# Altium PCB PCB_wordclocksmall_2022-11-27.pcbdoc (part 1 of 4)
Units mm, origin at the board's own origin, x right, y up, seen from the top; angles counter-clockwise.
Board outline 250.51 x 237.35 mm, 2 copper layers (Top Layer, Bottom Layer); 318 components, 218 nets, 1024 pads, 203 vias.
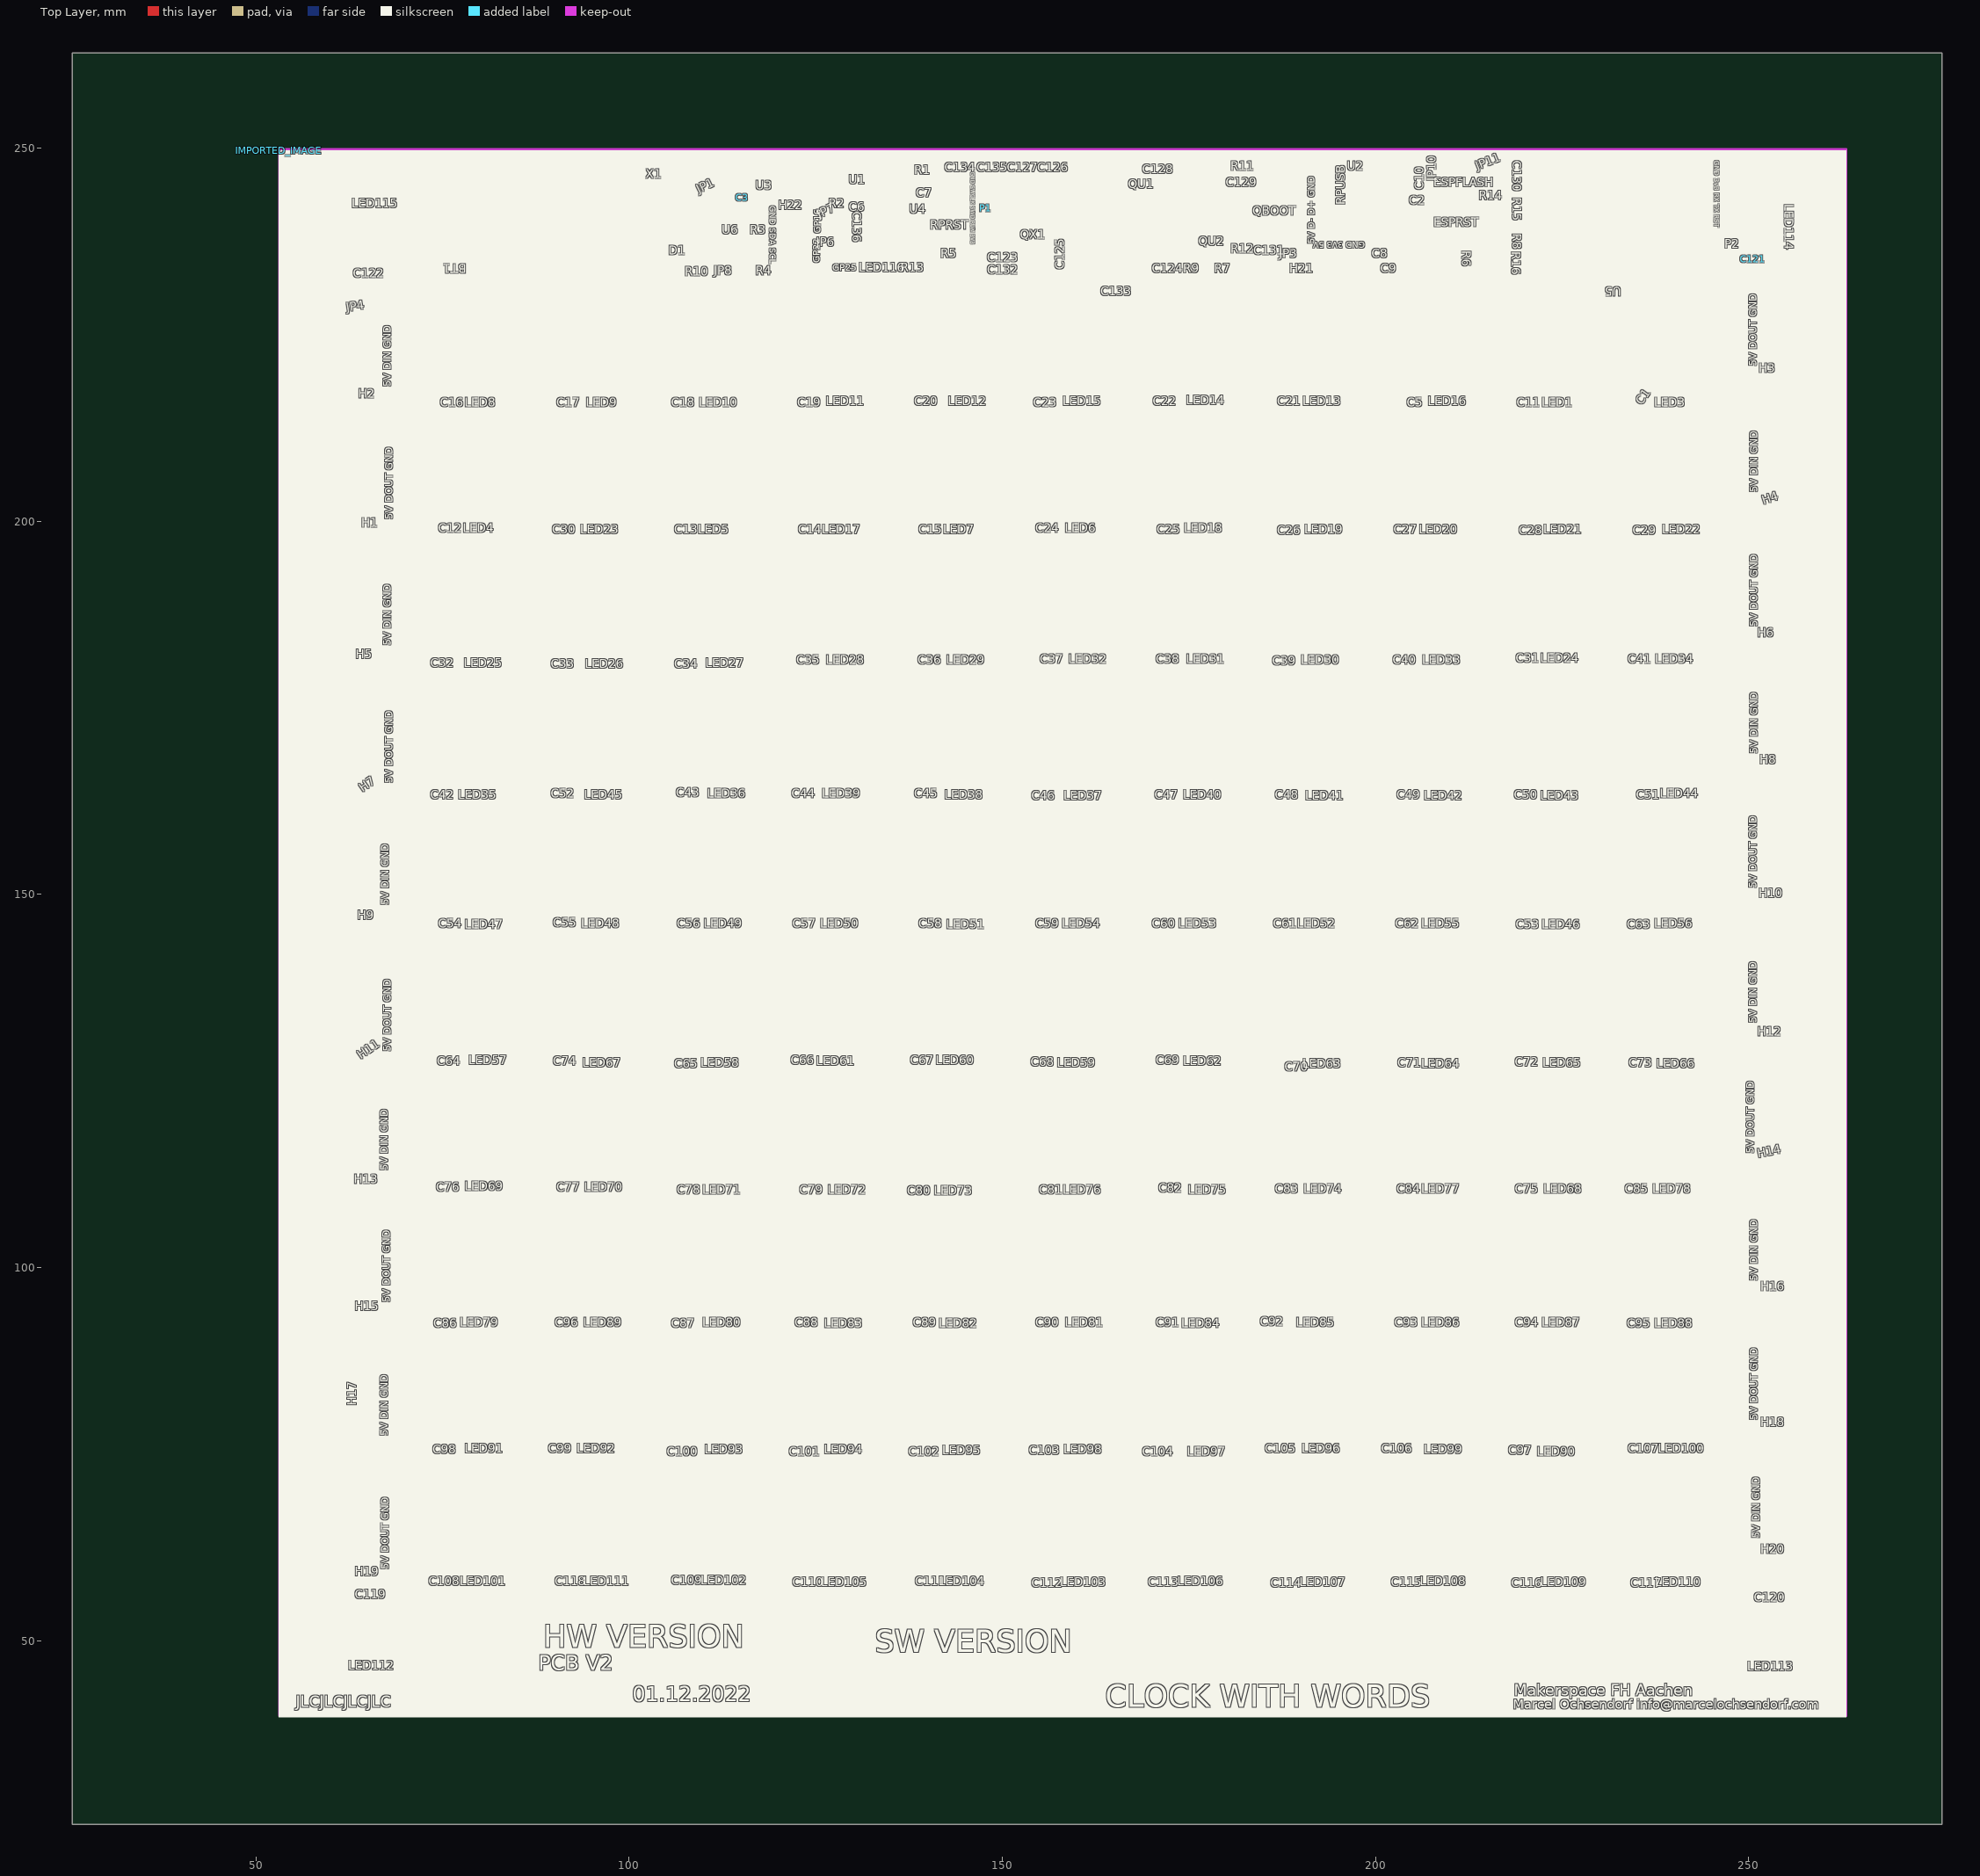
[diagram p0: Top Layer view]
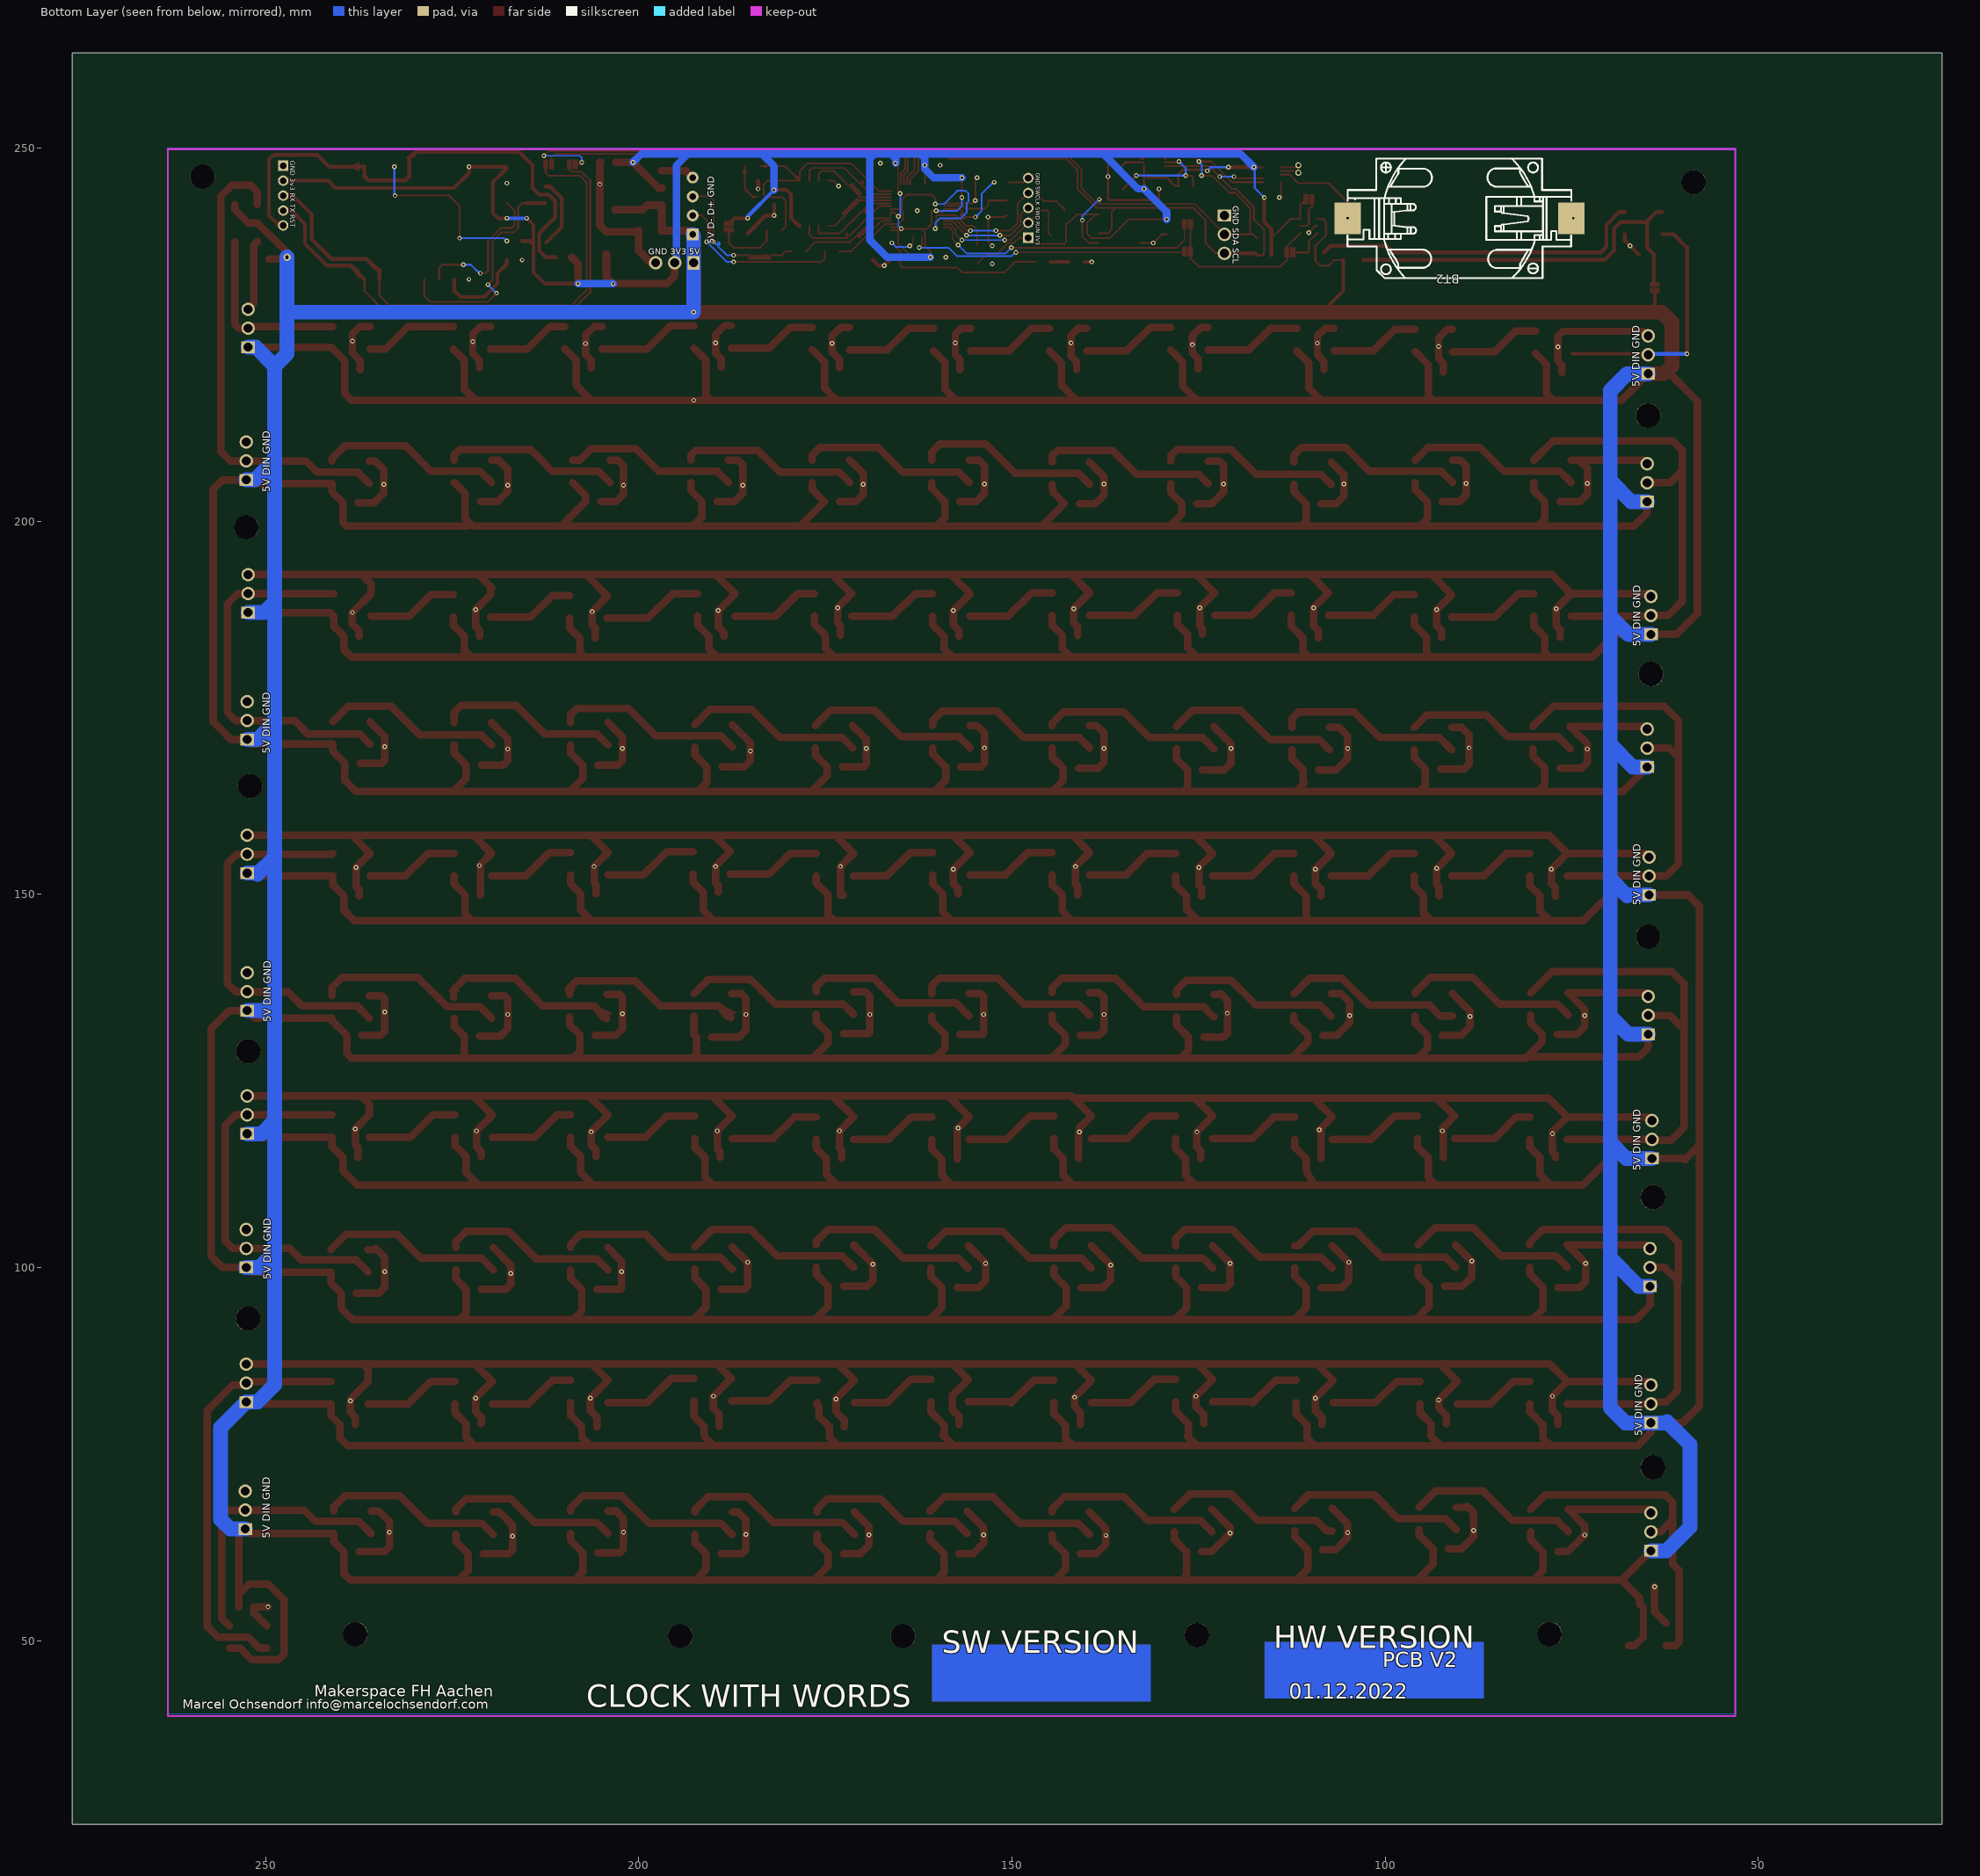
[diagram p1: Bottom Layer view, seen from below]

## Layer stack, top to bottom
Top Layer: signal copper (thickness not stored)
Dielectric: dielectric 0.32, FR-4, Dk 4.8
Bottom Layer: signal copper (thickness not stored)

## Board outline
275.915,25.4 25.4,25.4 25.4,262.754 275.915,262.754

## Components (designator, comment, footprint, x,y, rotation, side; value= is the part's Value field where it differs from the comment)
BT1 "BS-6-1" BAT-SMD_BS-6-1#1 90.045,240.593 r0 top
BT2 "BS-6-1" BAT-SMD_BS-6-1#2 90.045,240.593 r180 bottom
C1 "100nF" 0805 238.381,220.273 r180 top
C2 "100nF" 0805 204.218,241.736 r180 top
C3 "100nF" 0805 115.191,243.387 r180 top
C5 "100nF" 0805 207.393,220.527 r180 top
C6 "100nF" 0805 131.32,244.53 r0 top
C7 "100nF" 0805 136.146,244.53 r0 top
C8 "100uF" CAP-SMD_L3.5-W2.8 198.503,238.942 r0 top
C9 "100uF" CAP-SMD_L3.5-W2.8 204.345,237.291 r90 top
C10 "100nF" 0805 204.091,248.086 r180 top
C11 "100nF" 0805 222.379,220.527 r180 top
C12 "100nF" 0805 77.599,202.62 r180 top
C13 "100nF" 0805 109.603,202.366 r180 top
C14 "100nF" 0805 126.24,202.366 r180 top
C15 "100nF" 0805 141.988,202.366 r180 top
C16 "100nF" 0805 77.345,219.892 r180 top
C17 "100nF" 0805 93.22,220.019 r180 top
C18 "100nF" 0805 109.222,220.273 r180 top
C19 "100nF" 0805 126.113,220.4 r180 top
C20 "100nF" 0805 142.369,220.273 r180 top
C21 "100nF" 0805 189.994,220.654 r180 top
C22 "100nF" 0805 174.119,220.527 r180 top
C23 "100nF" 0805 157.99,220.273 r180 top
C24 "100nF" 0805 157.99,202.62 r180 top
C25 "100nF" 0805 174.119,202.62 r180 top
C26 "100nF" 0805 190.502,202.62 r180 top
C27 "100nF" 0805 206.123,202.62 r180 top
C28 "100nF" 0805 222.252,202.62 r180 top
C29 "100nF" 0805 238.635,202.493 r180 top
C30 "100nF" 0805 93.347,202.62 r180 top
C31 "100nF" 0805 222.379,184.586 r180 top
C32 "100nF" 0805 77.599,184.459 r180 top
C33 "100nF" 0805 93.474,184.459 r180 top
C34 "100nF" 0805 109.984,184.332 r180 top
C35 "100nF" 0805 125.478,184.84 r180 top
C36 "100nF" 0805 142.242,184.713 r180 top
C37 "100nF" 0805 158.117,184.586 r180 top
C38 "100nF" 0805 173.992,184.713 r180 top
C39 "100nF" 0805 189.613,184.586 r180 top
C40 "100nF" 0805 206.885,184.332 r180 top
C41 "100nF" 0805 238.508,184.586 r180 top
C42 "100nF" 0805 77.599,166.933 r180 top
C43 "100nF" 0805 109.984,166.679 r180 top
C44 "100nF" 0805 125.478,166.679 r180 top
C45 "100nF" 0805 142.115,166.933 r180 top
C46 "100nF" 0805 157.863,167.06 r180 top
C47 "100nF" 0805 173.738,167.06 r180 top
C48 "100nF" 0805 189.867,167.06 r180 top
C49 "100nF" 0805 206.504,167.314 r180 top
C50 "100nF" 0805 222.125,167.314 r180 top
C51 "100nF" 0805 238.381,167.568 r180 top
C52 "100nF" 0805 93.601,166.806 r180 top
C53 "100nF" 0805 222.252,149.915 r180 top
C54 "100nF" 0805 78.234,149.788 r180 top
C55 "100nF" 0805 93.855,149.788 r180 top
C56 "100nF" 0805 109.603,149.788 r180 top
C57 "100nF" 0805 125.605,149.788 r180 top
C58 "100nF" 0805 142.242,149.915 r180 top
C59 "100nF" 0805 158.244,150.042 r180 top
C60 "100nF" 0805 173.611,149.915 r180 top
C61 "100nF" 0805 190.375,150.296 r180 top
C62 "100nF" 0805 206.758,150.042 r180 top
C63 "100nF" 0805 238.508,149.788 r180 top
C64 "100nF" 0805 77.98,131.246 r180 top
C65 "100nF" 0805 109.349,131.119 r180 top
C66 "100nF" 0805 125.351,130.865 r180 top
C67 "100nF" 0805 141.861,131.119 r180 top
C68 "100nF" 0805 157.99,131.246 r180 top
C69 "100nF" 0805 173.611,131.373 r180 top
C70 "100nF" 0805 191.264,130.865 r180 top
C71 "100nF" 0805 206.885,131.119 r180 top
C72 "100nF" 0805 222.379,130.992 r180 top
C73 "100nF" 0805 238.127,131.119 r180 top
C74 "100nF" 0805 93.347,131.119 r180 top
C75 "100nF" 0805 222.125,114.863 r180 top
C76 "100nF" 0805 78.234,114.736 r180 top
C77 "100nF" 0805 93.22,114.736 r180 top
C78 "100nF" 0805 109.603,114.609 r180 top
C79 "100nF" 0805 125.732,114.609 r180 top
C80 "100nF" 0805 142.115,114.609 r180 top
C81 "100nF" 0805 158.371,114.482 r180 top
C82 "100nF" 0805 173.865,114.609 r180 top
C83 "100nF" 0805 190.121,114.736 r180 top
C84 "100nF" 0805 206.758,114.863 r180 top
C85 "100nF" 0805 238.635,114.736 r180 top
C86 "100nF" 0805 77.853,97.337 r180 top
C87 "100nF" 0805 109.603,97.337 r180 top
C88 "100nF" 0805 125.605,97.337 r180 top
C89 "100nF" 0805 141.734,97.337 r180 top
C90 "100nF" 0805 158.371,97.337 r180 top
C91 "100nF" 0805 173.611,97.464 r180 top
C92 "100nF" 0805 189.994,97.083 r180 top
C93 "100nF" 0805 206.631,97.083 r180 top
C94 "100nF" 0805 222.125,97.083 r180 top
C95 "100nF" 0805 238.889,96.575 r180 top
C96 "100nF" 0805 93.093,97.464 r180 top
C97 "100nF" 0805 222.125,79.049 r180 top
C98 "100nF" 0805 77.853,78.922 r180 top
C99 "100nF" 0805 92.839,79.049 r180 top
C100 "100nF" 0805 109.476,78.922 r180 top
C101 "100nF" 0805 125.351,79.049 r180 top
C102 "100nF" 0805 141.861,78.922 r180 top
C103 "100nF" 0805 158.117,78.922 r180 top
C104 "100nF" 0805 173.484,78.668 r180 top
C105 "100nF" 0805 190.248,78.668 r180 top
C106 "100nF" 0805 206.631,78.668 r180 top
C107 "100nF" 0805 239.016,78.922 r180 top
C108 "100nF" 0805 77.853,61.904 r180 top
C109 "100nF" 0805 109.349,62.158 r180 top
C110 "100nF" 0805 125.605,61.904 r180 top
C111 "100nF" 0805 141.861,61.65 r180 top
C112 "100nF" 0805 158.117,61.65 r180 top
C113 "100nF" 0805 173.611,61.65 r180 top
C114 "100nF" 0805 189.994,61.65 r180 top
C115 "100nF" 0805 206.504,61.777 r180 top
C116 "100nF" 0805 221.871,61.65 r180 top
C117 "100nF" 0805 238.508,61.904 r180 top
C118 "100nF" 0805 92.585,62.285 r180 top
C119 "100nF" 0805 64.899,54.919 r180 top
C120 "100nF" 0805 252.605,54.538 r180 top
C121 "100nF" 0805 250.573,235.132 r0 top
C122 "100nF" 0805 65.026,235.767 r0 top
C123 "100nF" 0805 153.672,236.91 r180 top
C124 "100nF" 0805 168.658,236.021 r270 top
C125 "100nF" 0805 159.895,235.386 r0 top
C126 "100nF" 0805 160.657,247.705 r0 top
C127 "100nF" 0805 155.704,246.054 r0 top
C128 "100nF" 0805 166.626,247.959 r180 top
C129 "100nF" 0805 181.866,243.387 r270 top
C130 "100nF" 0805 217.68,246.308 r270 top
C131 "100nF" 0805 185.422,239.577 r90 top
C132 "100nF" 0805 153.672,234.497 r0 top
C133 "100nF" 0805 164.975,235.386 r180 top
C134 "10pF" C0805 150.751,241.99 r270 top
C135 "10pF" C0805 151.386,245.419 r0 top
C136 "100nF" 0805 129.288,239.45 r270 top
D1 "CD4148WP" D1206-RD 104.269,235.005 r0 top
ESPFLASH "PTS810SJM250SMTRLFS" KEY-SMD_4P-L4.2-W3.2-P2.20-LS4.6 210.441,243.768 r0 top
ESPRST "PTS810SJM250SMTRLFS" KEY-SMD_4P-L4.2-W3.2-P2.20-LS4.6 210.314,238.434 r180 top
H1 "Header-Male-2.54_1x3" HDR-TH_3P-P2.54-V-M-1 64.899,205.16 r90 top
H2 "Header-Male-2.54_1x3" HDR-TH_3P-P2.54-V-M-1 64.772,222.305 r90 top
H3 "Header-Male-2.54_1x3" HDR-TH_3P-P2.54-V-M-1 252.351,225.861 r90 top
H4 "Header-Male-2.54_1x3" HDR-TH_3P-P2.54-V-M-1 252.605,208.081 r90 top
H5 "Header-Male-2.54_1x3" HDR-TH_3P-P2.54-V-M-1 64.391,187.38 r90 top
H6 "Header-Male-2.54_1x3" HDR-TH_3P-P2.54-V-M-1 252.351,190.301 r90 top
H7 "Header-Male-2.54_1x3" HDR-TH_3P-P2.54-V-M-1 64.899,169.6 r90 top
H8 "Header-Male-2.54_1x3" HDR-TH_3P-P2.54-V-M-1 252.478,173.283 r90 top
H9 "Header-Male-2.54_1x3" HDR-TH_3P-P2.54-V-M-1 64.645,152.455 r90 top
H10 "Header-Male-2.54_1x3" HDR-TH_3P-P2.54-V-M-1 252.478,155.376 r90 top
H11 "Header-Male-2.54_1x3" HDR-TH_3P-P2.54-V-M-1 64.772,133.786 r90 top
H12 "Header-Male-2.54_1x3" HDR-TH_3P-P2.54-V-M-1 252.478,136.961 r90 top
H13 "Header-Male-2.54_1x3" HDR-TH_3P-P2.54-V-M-1 64.264,117.149 r90 top
H14 "Header-Male-2.54_1x3" HDR-TH_3P-P2.54-V-M-1 252.478,120.451 r90 top
H15 "Header-Male-2.54_1x3" HDR-TH_3P-P2.54-V-M-1 64.518,100.004 r90 top
H16 "Header-Male-2.54_1x3" HDR-TH_3P-P2.54-V-M-1 252.605,102.544 r90 top
H17 "Header-Male-2.54_1x3" HDR-TH_3P-P2.54-V-M-1 64.391,81.716 r90 top
H18 "Header-Male-2.54_1x3" HDR-TH_3P-P2.54-V-M-1 252.605,84.51 r90 top
H19 "Header-Male-2.54_1x3" HDR-TH_3P-P2.54-V-M-1 64.391,64.571 r90 top
H20 "Header-Male-2.54_1x3" HDR-TH_3P-P2.54-V-M-1 252.732,67.492 r90 top
H21 "PWR" HDR-TH_3P-P2.54-V-M-1 195.201,234.624 r0 top
H22 "RPI2C" HDR-TH_3P-P2.54-V-M-1 121.541,238.434 r270 top
IMPORTED_IMAGE "IMPORTED_IMAGE" IMPORTED_IMAGE 53.088,249.708 r0 top
JP1 "OEE" JUMPERS_SMT-JUMPER_2_NC_PASTE_NO-SILK 110.238,243.133 r180 top
JP3 "JUMPER-SMT_2" JUMPERS_SMT-JUMPER_2_NC_PASTE_NO-SILK 187.962,239.45 r90 top
JP4 "5VLSL" JUMPERS_SMT-JUMPER_2_NC_PASTE_NO-SILK 63.883,231.322 r90 top
JP6 "GP22WS" JUMPERS_SMT-JUMPER_2_NC_PASTE_NO-SILK 126.494,236.148 r180 top
JP7 "GP16WS" JUMPERS_SMT-JUMPER_2_NC_PASTE_NO-SILK 126.494,239.831 r180 top
JP8 "JUMPER-SMT_2" JUMPERS_SMT-JUMPER_2_NC_PASTE_NO-SILK 112.778,236.021 r0 top
JP10 "ESPTX" JUMPERS_SMT-JUMPER_2_NC_PASTE_NO-SILK 208.917,247.832 r180 top
JP11 "ESPRX" JUMPERS_SMT-JUMPER_2_NC_PASTE_NO-SILK 212.092,247.832 r180 top
LED1 "WS2812B-B" LED-5050_4P 222.379,224.591 r0 top
LED3 "WS2812B-B" LED-5050_4P 238.508,224.591 r0 top
LED4 "WS2812B-B" LED-5050_4P 77.599,206.684 r0 top
LED5 "WS2812B-B" LED-5050_4P 109.73,206.43 r0 top
LED6 "WS2812B-B" LED-5050_4P 158.244,206.684 r0 top
LED7 "WS2812B-B" LED-5050_4P 142.115,206.43 r0 top
LED8 "WS2812B-B" LED-5050_4P 77.345,223.956 r0 top
LED9 "WS2812B-B" LED-5050_4P 93.474,224.21 r0 top
LED10 "WS2812B-B" LED-5050_4P 109.349,224.337 r0 top
LED11 "WS2812B-B" LED-5050_4P 126.24,224.464 r0 top
LED12 "WS2812B-B" LED-5050_4P 142.496,224.337 r0 top
LED13 "WS2812B-B" LED-5050_4P 190.121,224.718 r0 top
LED14 "WS2812B-B" LED-5050_4P 174.246,224.464 r0 top
LED15 "WS2812B-B" LED-5050_4P 157.99,224.337 r0 top
LED16 "WS2812B-B" LED-5050_4P 207.393,224.591 r0 top
LED17 "WS2812B-B" LED-5050_4P 126.24,206.557 r0 top
LED18 "WS2812B-B" LED-5050_4P 174.246,206.684 r0 top
LED19 "WS2812B-B" LED-5050_4P 190.502,206.684 r0 top
LED20 "WS2812B-B" LED-5050_4P 206.377,206.684 r0 top
LED21 "WS2812B-B" LED-5050_4P 222.252,206.684 r0 top
LED22 "WS2812B-B" LED-5050_4P 238.635,206.557 r0 top
LED23 "WS2812B-B" LED-5050_4P 93.474,206.684 r0 top
LED24 "WS2812B-B" LED-5050_4P 222.379,188.65 r0 top
LED25 "WS2812B-B" LED-5050_4P 77.599,188.777 r0 top
LED26 "WS2812B-B" LED-5050_4P 93.601,188.65 r0 top
LED27 "WS2812B-B" LED-5050_4P 110.111,188.904 r0 top
LED28 "WS2812B-B" LED-5050_4P 125.351,188.904 r0 top
LED29 "WS2812B-B" LED-5050_4P 142.115,188.904 r0 top
LED30 "WS2812B-B" LED-5050_4P 189.613,188.777 r0 top
LED31 "WS2812B-B" LED-5050_4P 173.992,188.777 r0 top
LED32 "WS2812B-B" LED-5050_4P 158.117,188.777 r0 top
LED33 "WS2812B-B" LED-5050_4P 206.758,188.523 r0 top
LED34 "WS2812B-B" LED-5050_4P 238.381,188.777 r0 top
LED35 "WS2812B-B" LED-5050_4P 77.726,170.997 r0 top
LED36 "WS2812B-B" LED-5050_4P 109.984,170.87 r0 top
LED37 "WS2812B-B" LED-5050_4P 158.117,171.124 r0 top
LED38 "WS2812B-B" LED-5050_4P 142.115,171.124 r0 top
LED39 "WS2812B-B" LED-5050_4P 125.478,170.997 r0 top
LED40 "WS2812B-B" LED-5050_4P 173.865,171.124 r0 top
LED41 "WS2812B-B" LED-5050_4P 189.994,171.251 r0 top
LED42 "WS2812B-B" LED-5050_4P 206.631,171.505 r0 top
LED43 "WS2812B-B" LED-5050_4P 222.252,171.505 r0 top
LED44 "WS2812B-B" LED-5050_4P 238.508,171.632 r0 top
LED45 "WS2812B-B" LED-5050_4P 93.601,170.87 r0 top
LED46 "WS2812B-B" LED-5050_4P 222.252,153.979 r0 top
LED47 "WS2812B-B" LED-5050_4P 78.107,153.979 r0 top
LED48 "WS2812B-B" LED-5050_4P 93.601,153.979 r0 top
LED49 "WS2812B-B" LED-5050_4P 109.73,153.979 r0 top
LED50 "WS2812B-B" LED-5050_4P 125.605,153.979 r0 top
LED51 "WS2812B-B" LED-5050_4P 142.115,154.106 r0 top
LED52 "WS2812B-B" LED-5050_4P 190.248,154.233 r0 top
LED53 "WS2812B-B" LED-5050_4P 173.738,153.979 r0 top
LED54 "WS2812B-B" LED-5050_4P 158.117,154.106 r0 top
LED55 "WS2812B-B" LED-5050_4P 206.631,154.106 r0 top
LED56 "WS2812B-B" LED-5050_4P 238.508,153.979 r0 top
LED57 "WS2812B-B" LED-5050_4P 77.98,135.31 r0 top
LED58 "WS2812B-B" LED-5050_4P 109.73,135.183 r0 top
LED59 "WS2812B-B" LED-5050_4P 158.244,135.183 r0 top
LED60 "WS2812B-B" LED-5050_4P 142.115,135.31 r0 top
LED61 "WS2812B-B" LED-5050_4P 125.478,135.056 r0 top
LED62 "WS2812B-B" LED-5050_4P 173.738,135.437 r0 top
LED63 "WS2812B-B" LED-5050_4P 190.121,135.183 r0 top
LED64 "WS2812B-B" LED-5050_4P 206.758,135.056 r0 top
LED65 "WS2812B-B" LED-5050_4P 222.252,134.929 r0 top
LED66 "WS2812B-B" LED-5050_4P 238.635,134.929 r0 top
LED67 "WS2812B-B" LED-5050_4P 93.474,135.183 r0 top
LED68 "WS2812B-B" LED-5050_4P 222.125,118.927 r0 top
LED69 "WS2812B-B" LED-5050_4P 78.107,118.673 r0 top
LED70 "WS2812B-B" LED-5050_4P 93.22,118.8 r0 top
LED71 "WS2812B-B" LED-5050_4P 109.603,118.673 r0 top
LED72 "WS2812B-B" LED-5050_4P 125.605,118.8 r0 top
LED73 "WS2812B-B" LED-5050_4P 141.861,118.8 r0 top
LED74 "WS2812B-B" LED-5050_4P 189.994,118.8 r0 top
LED75 "WS2812B-B" LED-5050_4P 173.738,118.673 r0 top
LED76 "WS2812B-B" LED-5050_4P 158.244,118.673 r0 top
LED77 "WS2812B-B" LED-5050_4P 206.631,118.927 r0 top
LED78 "WS2812B-B" LED-5050_4P 238.635,118.927 r0 top
LED79 "WS2812B-B" LED-5050_4P 78.107,101.528 r0 top
LED80 "WS2812B-B" LED-5050_4P 109.603,101.401 r0 top
LED81 "WS2812B-B" LED-5050_4P 158.371,101.401 r0 top
LED82 "WS2812B-B" LED-5050_4P 141.861,101.401 r0 top
LED83 "WS2812B-B" LED-5050_4P 125.605,101.401 r0 top
LED84 "WS2812B-B" LED-5050_4P 173.738,101.528 r0 top
LED85 "WS2812B-B" LED-5050_4P 189.994,101.274 r0 top
LED86 "WS2812B-B" LED-5050_4P 206.631,101.147 r0 top
LED87 "WS2812B-B" LED-5050_4P 221.998,101.147 r0 top
LED88 "WS2812B-B" LED-5050_4P 238.762,100.893 r0 top
LED89 "WS2812B-B" LED-5050_4P 93.093,101.528 r0 top
LED90 "WS2812B-B" LED-5050_4P 222.125,83.24 r0 top
LED91 "WS2812B-B" LED-5050_4P 78.107,83.24 r0 top
LED92 "WS2812B-B" LED-5050_4P 92.839,83.24 r0 top
LED93 "WS2812B-B" LED-5050_4P 109.476,83.367 r0 top
LED94 "WS2812B-B" LED-5050_4P 125.605,83.494 r0 top
LED95 "WS2812B-B" LED-5050_4P 141.861,83.367 r0 top
LED96 "WS2812B-B" LED-5050_4P 190.121,83.621 r0 top
LED97 "WS2812B-B" LED-5050_4P 173.611,83.367 r0 top
LED98 "WS2812B-B" LED-5050_4P 158.371,83.494 r0 top
LED99 "WS2812B-B" LED-5050_4P 206.631,83.367 r0 top
LED100 "WS2812B-B" LED-5050_4P 238.762,83.24 r0 top
LED101 "WS2812B-B" LED-5050_4P 77.98,66.095 r0 top
LED102 "WS2812B-B" LED-5050_4P 109.603,66.222 r0 top
LED103 "WS2812B-B" LED-5050_4P 158.498,65.841 r0 top
LED104 "WS2812B-B" LED-5050_4P 142.115,65.714 r0 top
LED105 "WS2812B-B" LED-5050_4P 125.732,66.095 r0 top
LED106 "WS2812B-B" LED-5050_4P 173.611,65.714 r0 top
LED107 "WS2812B-B" LED-5050_4P 189.994,65.714 r0 top
LED108 "WS2812B-B" LED-5050_4P 206.631,65.841 r0 top
LED109 "WS2812B-B" LED-5050_4P 221.998,65.714 r0 top
LED110 "WS2812B-B" LED-5050_4P 238.381,65.841 r0 top
LED111 "WS2812B-B" LED-5050_4P 92.966,66.349 r0 top
LED112 "WS2812B-B" LED-5050_4P 64.899,50.855 r0 top
LED113 "WS2812B-B" LED-5050_4P 252.351,50.474 r0 top
LED114 "WS2812B-B" LED-5050_4P 252.605,239.958 r90 top
LED115 "WS2812B-B" LED-5050_4P 65.407,239.958 r180 top
LED116 "FC-2012HRK-620D" LED0805-RD_RED 141.353,234.751 r0 top
P1 "RPSWD" HDR-TH_5P-P2.00-V-F-1 147.83,241.99 r90 top
P2 "ESPPROG" HDR-TH_5P-P2.00-V-F-1 247.652,243.641 r270 top
QBOOT "PTS810SJM250SMTRLFS" KEY-SMD_4P-L4.2-W3.2-P2.20-LS4.6 186.184,244.53 r180 top
QU1 "RP2040" LQFN-56_L7.0-W7.0-P0.4-EP 162.689,241.609 r270 top
QU2 "W25Q128JWPIQ" WSON-8_L6.0-W5.0-P1.27-BL-EP 176.532,242.625 r180 top
QX1 "12MHz" CRYSTAL-SMD_4P-L3.2-W2.5-BL 154.053,241.863 r270 top
R1 "4.7K" R0805#1 136.146,247.705 r0 top
R2 "1kΩ" R0805#2 126.748,244.911 r0 top
R3 "4.7K" R0805#1 116.207,237.926 r0 top
R4 "4.7K" R0805#1 116.207,235.64 r0 top
R5 "10K" 0805 143.766,238.307 r180 top
R6 "10K" 0805 210.06,235.386 r180 top
R7 "27Ω" R0805#1 178.564,236.148 r0 top
R8 "10K" 0805 216.664,237.545 r180 top
R9 "27Ω" R0805#1 174.119,236.148 r0 top
R10 "50" 0805 109.222,236.021 r0 top
R11 "1K" 0805 184.787,247.578 r0 top
R12 "1K" 0805 181.866,238.942 r180 top
R13 "100Ω" R0805#1 145.798,234.751 r180 top
R14 "10K" 0805 215.013,241.609 r90 top
R15 "10K" 0805 217.68,241.609 r90 top
R16 "10K" 0805 216.664,235.005 r0 top
RPRST "PTS810SJM250SMTRLFS" KEY-SMD_4P-L4.2-W3.2-P2.20-LS4.6 144.02,243.768 r270 top
RPUSB "HDR-M-2.54_1x4" HDR-M-2.54_1X4 192.788,242.244 r90 top
U1 "BH1750FVI-TR" WSOF-6_L2.6-W1.6-P0.50-TL-EP 130.939,248.086 r180 top
U2 "AMS1117-3.3" SOT-223_L6.5-W3.5-P2.30-LS7.0-BR 200.027,244.657 r180 top
U3 "PCF85263ATL/AX" DFN-10_L2.6-W2.6-P0.50-BL-EP 115.191,246.435 r270 top
U4 "M24C02-WMN6TP" SOIC-8_L4.9-W3.9-P1.27-LS6.0-BL 135.638,239.196 r270 top
U5 "ESP-12F(ESP8266MOD)" WIFIM-SMD_ESP-12F-ESP8266MOD 229.11,239.958 r180 top
U6 "TXB0101DBVT" SOT-23-6_L2.9-W1.6-P0.95-LS2.8-TL 110.238,239.577 r0 top
X1 "CFV206-60.003KDZF" OSC-TH_BD2.0-P0.70-D0.3 111.635,247.197 r0 top
? "" ? 45.874,144.327 r0 top

## Footprints (in the part's own frame and the unit in brackets; to place one, negate y for a bottom-side part, rotate by r counter-clockwise, add the part's x,y. Pads: shape width x height; smd on the part's side, far side on the other; paste and mask are expansions set on the pad)
0805 [mm]
  rect 1.16x1.45 smd: 1(-1.016,0) 2(1.016,0)
  silkscreen extent -1.9,-1.03 1.87,1.04
BAT-SMD_BS-6-1#1 [mm]
  rect 3.5x4.2 smd: 1(14.988,0) 2(-14.988,0)
  silkscreen extent -14.99,-8 15.01,8
BAT-SMD_BS-6-1#2 [mm]
  rect 3.5x4.2 smd: 1(-14.988,0) 2(14.988,0)
  silkscreen extent -15.01,-8 14.99,8
C0805 [mm]
  rect 1.41x1.35 smd: 1(-1,0) 2(1,0)
  silkscreen extent -1.96,-0.9 1.96,0.9
CAP-SMD_L3.5-W2.8 [mm]
  rect 1.8x2.6 smd: 1(-1.501,0) 2(1.501,0)
  silkscreen extent -3.26,-1.65 2.73,1.65
CRYSTAL-SMD_4P-L3.2-W2.5-BL [mm]
  rect 1.4x1.2 smd: 1(-1.1,-0.85) 2(1.1,-0.85) 3(1.1,0.85) 4(-1.1,0.85)
  silkscreen extent -2.26,-1.91 2.03,1.68
D1206-RD [mm]
  rect 1.785x1.62 smd: 1(-1.343,0) 2(1.342,0)
  silkscreen extent -2.77,-1.08 2.46,1.08
DFN-10_L2.6-W2.6-P0.50-BL-EP [mm]
  rect 0.28x0.585 smd: 1(-1,-1.217) 2(-0.5,-1.217) 3(0,-1.217) 4(0.5,-1.217) 5(1,-1.217) 6(1,1.217) 7(0.5,1.217) 8(0,1.217) 9(-0.5,1.217) 10(-1,1.217)
  rect 2.3x1.3 smd: 11(0,0)
  silkscreen extent -1.38,-1.88 1.38,1.38
HDR-M-2.54_1X4 [mil]
  rect 62x62 hole 35: 1(-150,0)
  round 62 hole 35: 2(-50,0) 3(50,0) 4(150,0)
  silkscreen extent -200,-50 200,50
HDR-TH_3P-P2.54-V-M-1 [mm]
  rect 1.575x1.8 hole 1.2: 1(-2.54,0)
  round 1.8 hole 1.2: 2(0,0) 3(2.54,0)
  silkscreen extent -3.81,-1.27 3.81,1.27
HDR-TH_5P-P2.00-V-F-1 [mm]
  rect 1.4x1.4 hole 0.889: 1(-4,0)
  round 1.4 hole 0.889: 2(-2,0) 3(0,0) 4(2,0) 5(4,0)
  silkscreen extent -5,-1 5,1.03
IMPORTED_IMAGE [mm]
  silkscreen extent 0,-210 210,0
JUMPERS_SMT-JUMPER_2_NC_PASTE_NO-SILK [mil]
  round 0 smd: 1(-16,0) 2(16,0)
  Top Layer region: -28.5,25 -3.5,25 -3.5,-25 -28.5,-25
  Top Layer region: 3.5,25 28.5,25 28.5,-25 3.5,-25
  silkscreen extent -46,-40 46,40
KEY-SMD_4P-L4.2-W3.2-P2.20-LS4.6 [mm]
  rect 1.05x0.7 smd: 1(-2.1,1.075) 2(2.1,1.075) 3(-2.1,-1.075) 4(2.1,-1.075)
  silkscreen extent -2.2,-1.55 2.2,1.52
LED0805-RD_RED [mm]
  rect 1x1.25 smd: 1(-1.1,0) 2(1.1,0)
  silkscreen extent -2.1,-0.95 1.98,0.96
LED-5050_4P [mm]
  rect 1.5x1 smd: 1(2.5,-1.5) 2(2.5,1.5) 3(-2.5,1.5) 4(-2.5,-1.5)
  silkscreen extent -2.7,-2.5 2.5,2.65
LQFN-56_L7.0-W7.0-P0.4-EP [mm]
  rect 1.1x0.2 smd: 1(-3.55,2.6) 2(-3.55,2.2) 3(-3.55,1.8) 4(-3.55,1.4) 5(-3.55,1) 6(-3.55,0.6) 7(-3.55,0.2) 8(-3.55,-0.2) 9(-3.55,-0.6) 10(-3.55,-1) 11(-3.55,-1.4) 12(-3.55,-1.8) 13(-3.55,-2.2) 14(-3.55,-2.6) 29(3.55,-2.6) 30(3.55,-2.2) 31(3.55,-1.8) 32(3.55,-1.4) 33(3.55,-1) 34(3.55,-0.6) 35(3.55,-0.2) 36(3.55,0.2) 37(3.55,0.6) 38(3.55,1) 39(3.55,1.4) 40(3.55,1.8) 41(3.55,2.2) 42(3.55,2.6)
  rect 0.2x1.1 smd: 15(-2.6,-3.55) 16(-2.2,-3.55) 17(-1.8,-3.55) 18(-1.4,-3.55) 19(-1,-3.55) 20(-0.6,-3.55) 21(-0.2,-3.55) 22(0.2,-3.55) 23(0.6,-3.55) 24(1,-3.55) 25(1.4,-3.55) 26(1.8,-3.55) 27(2.2,-3.55) 28(2.6,-3.55) 43(2.6,3.55) 44(2.2,3.55) 45(1.8,3.55) 46(1.4,3.55) 47(1,3.55) 48(0.6,3.55) 49(0.2,3.55) 50(-0.2,3.55) 51(-0.6,3.55) 52(-1,3.55) 53(-1.4,3.55) 54(-1.8,3.55) 55(-2.2,3.55) 56(-2.6,3.55)
  rect 3.1x3.1 smd: 57(0,0)
  silkscreen extent -4.13,-3.5 3.5,3.83
OSC-TH_BD2.0-P0.70-D0.3 [mm]
  round 0.8 hole 0.5: 1(0,0.5) 2(0,-0.5)
  silkscreen extent -7.6,-1 -0.54,1
R0805#1 [mm]
  rect 1.133x1.377 smd: 1(-0.966,0) 2(0.966,0)
  silkscreen extent -1.76,-0.92 1.76,0.92
R0805#2 [mm]
  rect 1.133x1.377 smd: 1(-1,0) 2(1,0)
  silkscreen extent -1.76,-0.92 1.76,0.92
SOIC-8_L4.9-W3.9-P1.27-LS6.0-BL [mm]
  oval 0.588x2.045 smd: 1(-1.905,-2.773) 2(-0.635,-2.773) 3(0.635,-2.773) 4(1.905,-2.773) 5(1.905,2.773) 6(0.635,2.773) 7(-0.635,2.773) 8(-1.905,2.773)
  silkscreen extent -2.8,-2.92 2.53,1.52
SOT-23-6_L2.9-W1.6-P0.95-LS2.8-TL [mm]
  rect 1.072x0.532 smd: 1(-1.149,0.95) 2(-1.149,0) 3(-1.149,-0.95) 4(1.149,-0.95) 5(1.149,0) 6(1.149,0.95)
  silkscreen extent -1.45,-1.54 0.89,1.82
SOT-223_L6.5-W3.5-P2.30-LS7.0-BR [mil]
  rect 85x43 smd: 1(122,-90.5) 2(122,0.5) 3(122,90.5)
  rect 85x138 smd: 4(-122,0.5)
  silkscreen extent -64,-132 64,132
WIFIM-SMD_ESP-12F-ESP8266MOD [mm]
  rect 1.4x2.5 smd: 1(-7.651,-7.551) 2(-5.651,-7.551) 3(-3.651,-7.551) 4(-1.651,-7.551) 5(0.349,-7.551) 6(2.349,-7.551) 7(4.349,-7.551) 8(6.349,-7.551) 9(6.349,7.549) 10(4.349,7.55) 11(2.349,7.551) 12(0.349,7.551) 13(-1.651,7.55) 14(-3.651,7.551) 15(-5.651,7.55) 16(-7.651,7.551)
  rect 1.7x1.4 smd: 17(7.65,-5) 18(7.649,-3.002) 19(7.649,-1.003) 20(7.649,0.998) 21(7.649,2.997) 22(7.65,4.997)
  silkscreen extent -16.15,-8.92 7.85,8
WSOF-6_L2.6-W1.6-P0.50-TL-EP [mm]
  rect 0.505x0.28 smd: 1(-1.428,0.5) 2(-1.428,0) 3(-1.428,-0.5) 4(1.428,-0.5) 5(1.428,0) 6(1.428,0.5)
  rect 1.5x1.2 smd: 7(0,0)
  silkscreen extent -2.05,-0.88 1.58,0.88
WSON-8_L6.0-W5.0-P1.27-BL-EP [mm]
  oval 0.581x1.276 smd: 1(-1.905,-3.013) 2(-0.635,-3.013) 3(0.635,-3.013) 4(1.905,-3.013) 5(1.905,3.013) 6(0.635,3.013) 7(-0.635,3.013) 8(-1.905,3.013)
  rect 4.3x3.4 smd: 9(0,0)
  silkscreen extent -2.58,-4.05 2.58,3.08
? [mm]

## Free pads (board coordinates)
  round 3.3 hole 3.3 unplated: ""(58.676,245.419) ""(64.137,73.207) ""(64.137,109.402) ""(64.391,179.506) ""(64.772,144.327) ""(64.772,214.177) ""(77.98,50.855) ""(125.224,50.728) ""(164.594,50.601) ""(194.439,50.601) ""(238,50.855) ""(252.097,164.52) ""(252.351,93.146) ""(252.351,128.96) ""(252.605,199.191) ""(258.447,246.181)

## Via types
v1: diameter 0.635, hole 0.305, Top Layer to Bottom Layer, tented both sides, 165 vias
v2: diameter 0.61, hole 0.305, Top Layer to Bottom Layer, tented both sides, 37 vias
v3: diameter 1, hole 0.5, Top Layer to Bottom Layer, tented both sides, 1 vias

## Nets (pads, with @x,y where several pads share a name; then routed paths per layer and width w, separated by ;. In a path a pad name is that pad's centre, name@x,y a point inside that pad or via, vN(x,y) a via of type N, cw(c..) or ccw(c..) an arc to the next point about the centre after c; other vN are vias at no path point)
5VDIN: LED115.4 R10.1 | length 45
  Top Layer w0.508: LED115.4@67.907,241.458 68.606,241.458 70.36,239.704 70.36,236.783 71.122,236.021 98.935,236.021 99.824,236.91 107.317,236.91 R10.1@108.206,236.021
+1V1: C123.1 C124.1 QU1.23 QU1.45 QU1.50 | length 39.7
  Top Layer w0.229: C123.1@154.688,236.91 154.688,239.069 155.196,239.577 156.085,239.577 157.518,241.01 QU1.23@159.138,241.01 ; QU1.23@159.139,241.009 159.987,241.009 160.149,240.847 160.149,239.323 v1(160.276,239.196) ; v1(160.276,242.498) 160.276,243.26 160.784,243.768 164.086,243.768 164.721,243.133 164.721,242.01 164.922,241.81 ; QU1.45@166.239,239.809 167.029,239.809 168.658,238.18 C124.1@168.658,237.037 ; QU1.45@166.239,239.809 165.252,239.808 164.594,240.466 164.594,241.482 164.922,241.81 ; QU1.50@166.24,241.81 164.922,241.81
  Bottom Layer w0.229: v1(160.276,239.196) 160.276,239.958 159.641,240.593 156.847,240.593 156.085,241.355 156.085,242.625 155.831,242.879 155.831,243.895 156.212,244.276 157.355,244.276 159.133,242.498 v1(160.276,242.498)